# Altium PCB 6C-2L-1550um.PcbDoc
Units mm, origin at the board's own origin, x right, y up, seen from the top; angles counter-clockwise.
Board outline 17.5 x 20 mm, 2 copper layers (Top Layer, Bottom Layer), stack 1.586 mm thick; 22 components, 13 nets, 82 pads, 21 vias.
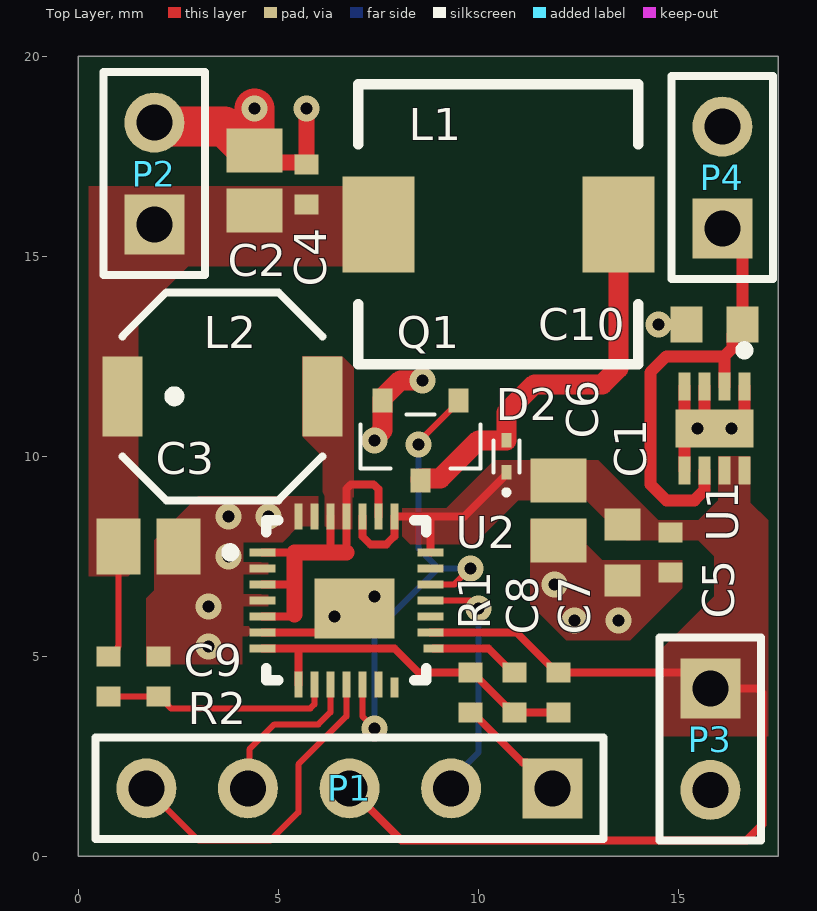
[diagram p0: Top Layer view]
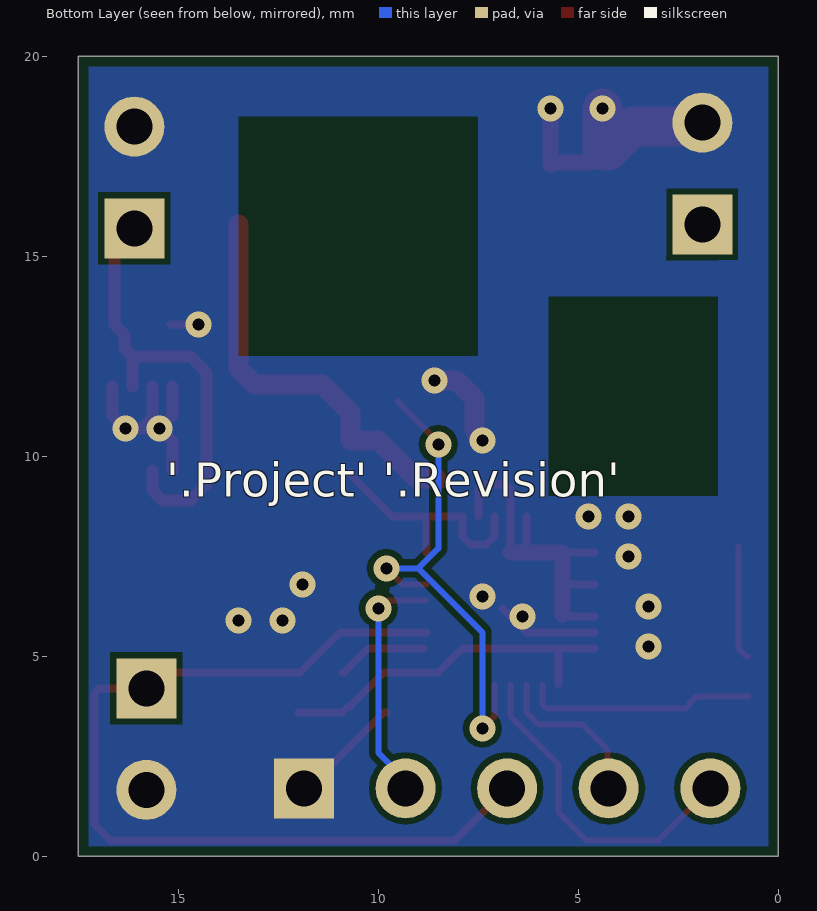
[diagram p1: Bottom Layer view, seen from below]
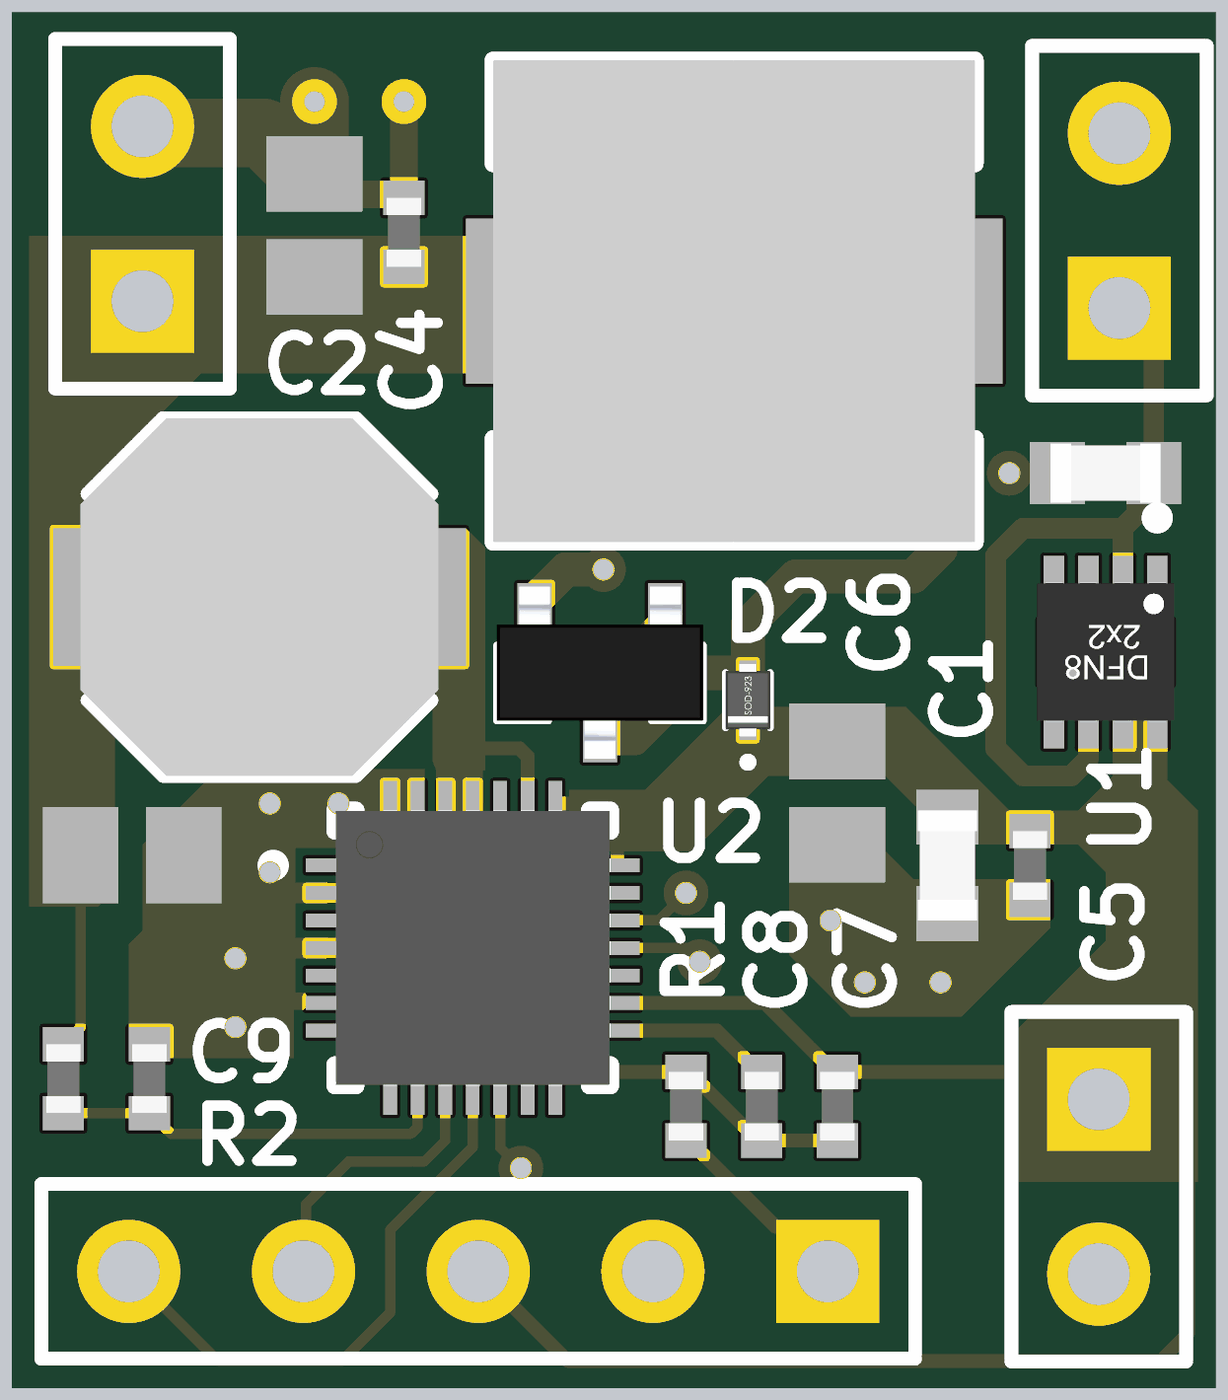
[diagram p2: 3D render of the assembled board from above, using the file's embedded part models]

## Layer stack, top to bottom
Top Solder: solder mask 0.0102, Solder Resist, Dk 3.5
Top Layer: signal copper 0.018
Dielectric1: core 1.55, FR-4, Dk 4.8
Bottom Layer: signal copper 0.018
Bottom Solder: solder mask 0.0102, Solder Resist, Dk 3.5

## Board outline
0,0 17.5,0 17.5,20 0,20

## Design rules (kind name [scope] priority, off if disabled: settings)
BoardOutlineClearance [All] p1: gap=0.25 ignorepadtopadclearanceinfootprint=FALSE except(0: Arc-SplitContinuation Track-SplitContinuation SMDPad-SplitContinuation THPad-SplitContinuation Via-SplitContinuation Fill-SplitContinuation Poly-SplitContinuation Region-SplitContinuation Text-SplitContinuation)
Clearance Clearance-xPP-xTP-xTT [All] p1: gap=0.15 ignorepadtopadclearanceinfootprint=FALSE except(0: Arc-Hole Track-Hole SMDPad-Hole THPad-Hole Via-Hole Fill-Hole Poly-Hole Region-Hole Text-Hole)
ComponentClearance [All] p1: gap=0.25 collisioncheckmode=3 verticalgap=0.25 showdistances=FALSE
DiffPairsRouting [All] p1: maxlimit=0.25 minlimit=0.25 mostfreqgap=0.25 toplayer_minwidth=0.381 toplayer_maxwidth=0.381 toplayer_prefwidth=0.381 bottomlayer_minwidth=0.381 bottomlayer_maxwidth=0.381 bottomlayer_prefwidth=0.381 maxuncoupledlength=12.5
Height [All] p1: minheight=0 maxheight=25 prefheight=12.5
HoleSize HoleSize-PTH [All] p1: absolutevalues=TRUE maxlimit=2 minlimit=0.25 maxpercent=80.000 minpercent=20.000
HoleToHoleClearance [All] p1: gap=0.35 allowstackedmicrovias=TRUE
MinimumAnnularRing "Minimum IAR  >0.45mm" [((ObjectKind = 'Pad') OR (ObjectKind = 'Via')) And (Layer = 'MultiLayer') And (HoleDiameter > AsMM(0.45))] p1: minimumring=0.175 // minimum inner annular ring for pads > 0.45mm finished hole size
MinimumAnnularRing "Minimum IAR <=0.45mm" [((ObjectKind = 'Pad') OR (ObjectKind = 'Via')) And (Layer = 'MultiLayer') And (HoleDiameter <= AsMM(0.45))] p2: minimumring=0.175 // minimum inner annular ring for pads <= 0.45mm finished hole size
MinimumSolderMaskSliver [All] p1: minsoldermaskwidth=0.08
PlaneClearance PlaneClearance-IPI [All] p1: clearance=0.25
PlaneConnect [All] p1: planeconnectstyle=Relief reliefexpansion=0.175 reliefentries=4 reliefconductorwidth=0.2 reliefairgap=0.2
PolygonConnect PolygonConnect-xTW [All] p1: connectstyle=Direct reliefconductorwidth=0.2 reliefentries=4 polygonreliefangle="90 Angle" airgapwidth=0.2
RoutingCorners [All] p1: cornerstyle=45-Degree minsetback=2.5 maxsetback=2.5
RoutingVias "RoutingVias <= 0.45mm" [(ObjectKind = 'Via') And (HoleDiameter <= AsMM(0.45))] p1: holewidth=0.3 width=0.65 viastyle="Through Hole" minholewidth=0.25 minwidth=0.6 maxholewidth=0.45 maxwidth=0.8 // finishet hole size <= 0.45mm
RoutingVias "RoutingVias > 0.45mm" [(ObjectKind = 'Via') And (HoleDiameter > AsMM(0.45))] p2: holewidth=0.5 width=0.85 viastyle="Through Hole" minholewidth=0.5 minwidth=0.85 maxholewidth=0.9 maxwidth=1.25 // finishet hole size > 0.45mm
SilkToSilkClearance [All] p1: silktosilkclearance=0.2
SilkToSolderMaskClearance SilkscreenOverComponentPads [IsPad] p1: minsilkscreentomaskgap=0.2 clearancetoexposedcopper=TRUE
SolderMaskExpansion [All] p1: expansion=0 istentingtop=FALSE
UnRoutedNet [All] p1: checkbadconnections=TRUE
Width Width-xTW [All] p1: maxlimit=1.5 minlimit=0.15 preferedwidth=0.2
18 further rules are at their usual default settings.

## Classes and differential pairs
component class Sunboost: C1 C2 C3 C4 C5 C6 C7 C8 C9 C10 D2 L1 L2 P1 P2 P3 P4 R1 R2 U1

## Components (designator, comment, footprint, x,y, rotation, side; value= is the part's Value field where it differs from the comment)
C1 "Cap_0603" 0603 13.6,7.6 r90 top value=2.2uF
C2 "Cap_0805" 0805 4.4,16.9 r270 top value=22uF
C3 "Cap_0805" 0805 1.75,7.75 r180 top value=22uF
C4 "Cap_0402" 0402 5.7,16.8 r270 top value=100nF
C5 "Cap_0402" 0402 14.8,7.6 r90 top value=100nF
C6 "Cap_0805" 0805 12,8.65 r90 top value=22uF
C7 "Cap_0402" 0402 12,4.1 r90 top value=100nF
C8 "Cap_0402" 0402 10.9,4.1 r90 top value=470nF
C9 "Cap_0402" 0402 2,4.5 r270 top value=100nF
C10 "Cap_0603" 0603 15.9,13.3 r0 top value=2.2uF
D2 "NSR0140P2" SOD-923 10.7,9.6 r90 top
L1 "SRR7045-102M" SRR7045-102M 7.5,15.8 r0 top value=X
L2 "SD53-4R7-R" SD53-4R7-R 3.6,11.5 r0 top value=X
P1 "Header 5" HDR1X5 11.86,1.7 r180 top
P2 "Header 2" HDR1X2 1.9,15.8 r90 top
P3 "Header 2" HDR1X2 15.8,4.2 r270 top
P4 "Header 2" HDR1X2 16.1,15.7 r90 top
Q1 "PMV130ENE" SOT-23 9.5,11.4 r180 top
R1 "Res_0402" 0402 9.8,4.1 r270 top value=0
R2 "Res_0402" 0402 0.75,4.5 r270 top value=51K
U1 "MCP1810" VDFN8 16.65,11.75 r270 top
U2 "Sunboost 3" 28-QFN_0.4mm 4.6,7.6 r0 top

## Footprints (in the part's own frame and the unit in brackets; to place one, negate y for a bottom-side part, rotate by r counter-clockwise, add the part's x,y. Pads: shape width x height; smd on the part's side, far side on the other; paste and mask are expansions set on the pad)
28-QFN_0.4mm [mm]
  rect 0.65x0.2 smd mask+0.05: 1(0,0) 2(0,-0.4) 3(0,-0.8) 4(0,-1.2) 5(0,-1.6) 6(0,-2) 7(0,-2.4) 16(4.2,-2) 17(4.2,-1.6) 18(4.2,-1.2) 19(4.2,-0.8) 20(4.2,-0.4) 21(4.2,0)
  rect 0.2x0.65 smd mask+0.05: 8(0.9,-3.3) 9(1.3,-3.3) 10(1.7,-3.3) 11(2.1,-3.3) 12(2.5,-3.3) 13(2.9,-3.3) 22(3.3,0.9) 23(2.9,0.9) 24(2.5,0.9) 25(2.1,0.9) 26(1.7,0.9) 27(1.3,0.9) 28(0.9,0.9)
  rect 0.2x0.5 smd mask+0.05: 14(3.3,-3.375)
  rect 0.5x0.2 smd mask+0.05: 15(4.275,-2.4)
  rect 2x1.5 smd mask+0.05: 29(2.3,-1.4)
  silkscreen extent -0.9,-3.2 4.1,0.8, body extent 0.1,-3.2 4.1,0.8, height 0.75
0402 [mm]
  rect 0.5x0.6 smd mask+0.05: 1(-0.5,0) 2(0.5,0)
  body extent -0.5,-0.25 0.5,0.25, height 0.25
0603 [mm] "0603 footprint"
  rect 0.8x0.9 smd: 1(-0.7,0) 2(0.7,0)
  body extent -0.8,-0.43 0.8,0.43, height 0.48
0805 [mm] "Chip Capacitor, Body 2.0x1.3mm, IPC High Density"
  rect 1.1x1.4 smd: 1(-0.75,0) 2(0.75,0)
  body extent -1.1,-0.72 1.1,0.72, height 1.4
HDR1X2 [mm] "Connector; Header; 2 Position"
  rect 1.5x1.5 hole 0.9: 1(0,0)
  round 1.5 hole 0.9: 2(2.54,0)
  silkscreen extent -1.27,-1.27 3.81,1.27
HDR1X5 [mm] "Connector; Header; 5 Position"
  rect 1.5x1.5 hole 0.9: 1(0,0)
  round 1.5 hole 0.9: 2(2.54,0) 3(5.08,0) 4(7.62,0) 5(10.16,0)
  silkscreen extent -1.27,-1.27 11.43,1.27
SD53-4R7-R [mm]
  rect 1x2 smd mask+0.05: 1(-2.5,0) 2(2.5,0)
  silkscreen extent -2.5,-2.6 2.5,2.6, body extent -2.6,-2.6 2.6,2.6, height 3
SOD-923 [mm]
  rect 0.36x0.25 smd mask+0.05: 1(0,0) 2(0.8,0)
  silkscreen extent -0.52,-0.33 0.8,0.33, body extent -0.12,-0.32 0.93,0.32, height 0.43
SOT-23 [mm]
  rect 0.5x0.6 smd mask+0.05: 1(0,0) 2(1.9,0) 3(0.95,2)
  silkscreen extent -0.55,0.35 2.45,1.7, body extent -0.55,-0.25 2.45,2.25, height 1.1
SRR7045-102M [mm]
  rect 1.8x2.4 smd mask+0.05: 1(0,0) 2(6,0)
  silkscreen extent -0.5,-3.5 6.5,3.5, body extent -0.5,-3.5 6.5,3.5, height 4.5
VDFN8 [mm] "2x2mm"
  rect 0.7x0.3 smd mask+0.05: 1(0,0) 2(0,-0.5) 3(0,-1) 4(0,-1.5) 5(2.1,-1.5) 6(2.1,-1) 7(2.1,-0.5) 8(2.1,0)
  rect 0.95x1.95 smd mask+0.05: 9(1.05,-0.75)
  silkscreen extent -1,-0.1 -0.8,0.1, body extent 0.04,-1.75 2.06,0.25, height 0.95

## Part data
C1 C2 C3 C4 C5 C6 C7 C8 C9 C10: "Capacitor", LatestRevisionDate=17-Jul-2002, LatestRevisionNote="Re-released for DXP Platform.", PackageDescription="Radial Cap, Thru-Hole; 2 Leads; 0.3 in Pin Spacing", PackageReference=RAD-0.3, Published=8-Jun-2000, Publisher="Altium Limited"
D2: "Typical INFRARED GaAs LED", LatestRevisionDate=08-Jul-2005, LatestRevisionNote="Mech Layer 1 removed.", PackageDescription="LED; 2 Leads", PackageReference=LED-0, Published=8-Jun-2000, Publisher="Altium Limited"
L1 L2: "Inductor"
P1: "Header, 5-Pin", LatestRevisionDate=17-Jul-2002, LatestRevisionNote="Re-released for DXP Platform.", Publisher="Altium Limited"
P2 P3 P4: "Header, 2-Pin", LatestRevisionDate=17-Jul-2002, LatestRevisionNote="Re-released for DXP Platform.", Publisher="Altium Limited"
Q1: "N-Channel MOSFET", LatestRevisionDate=17-Jul-2002, LatestRevisionNote="Re-released for DXP Platform.", PackageDescription="TO, Flat Index; 3 In-Line, Axial Leads; Body Dia. 4.6mm; Lead Dia. 0.5 mm (max)", PackageReference=E3, PackageVersion=1995/1996, Published=8-Jun-2000, Publisher="Altium Limited"
R1 R2: "Resistor", LatestRevisionDate=17-Jul-2002, LatestRevisionNote="Re-released for DXP Platform.", PackageDescription="Axial Device, Thru-Hole; 2 Leads; 0.4 in Pin Spacing", PackageReference=AXIAL-0.4, Published=8-Jun-2000, Publisher="Altium Limited"
U1: "3V Regulator, 150 mA"
U2: "Initvation Sunboost 3"

## Via types
v1: diameter 0.65, hole 0.3, Top Layer to Bottom Layer, tented both sides, 19 vias
v2: diameter 0.65, hole 0.3, Top Layer to Bottom Layer, 2 vias

## Nets (pads, with @x,y where several pads share a name; then routed paths per layer and width w, separated by ;. In a path a pad name is that pad's centre, name@x,y a point inside that pad or via, vN(x,y) a via of type N, cw(c..) or ccw(c..) an arc to the next point about the centre after c; other vN are vias at no path point)
DGND: C7.1 C8.1 R1.1 U2.7 U2.8 | length 9
  Top Layer w0.2: U2.7 5.5,5.2 ; U2.8 5.5,5.2 ; C7.1 C8.1 10.75,3.75 10.7,3.75 9.85,4.6 R1.1 8.5,4.6 7.9,5.2 5.5,5.2
GND: C1.1 C2.1 C3.1 C4.1 C5.1 C6.1 C9.1 C10.1 P1.1 P2.2 P3.2 P4.2 Q1.2 R1.2 U1.1 U1.3 U1.4 U1.5 U1.9 U2.2 U2.4 U2.6 U2.27 U2.28 U2.29 | length 20.7
  Top Layer w0.2: U2.6 6.3,5.6 U2.29 ; R1.2 9.85,3.6 11.1,2.35 11.21,2.35 P1.1 ; v1(14.5,13.3) C10.1
  Top Layer w0.3: U1.5 15.15,10.375 v1(15.475,10.7) ; U1.4 15.15,11.025 v1(15.475,10.7) ; U1.3 15.65,10.95 U1.9 ; U1.1 16.65,11.025 v1(16.325,10.7) U1.9 ; v1(15.475,10.7) U1.9
  Top Layer w0.4: C2.1 4.7,17.35 5.65,17.35 C4.1 v2(5.7,18.7)
  Top Layer w0.5: v1(7.4,10.4) 7.4,10.441 7.6,10.641 7.6,11.45 8.05,11.9 v1(8.6,11.9)
  Top Layer w1: P2.2 1.996,18.244 3.656,18.244 4.25,17.65 C2.1 v2(4.4,18.7)
  other v1: 3.25,5.25 12.4,5.9 13.5,5.9 6.4,6 3.25,6.25 7.4,6.5 11.9,6.8 3.75,7.5 3.75,8.5 4.75,8.5
ICSP: P1.2 U2.18 | length 6.1
  Top Layer w0.15: U2.18 9.8,6.4 v1(10,6.2)
  Bottom Layer w0.15: P1.2 9.32,1.91 10,2.59 v1(10,6.2)
ICSPCLK: P1.4 U2.10 | length 4.1
  Top Layer w0.15: P1.4 4.275,1.735 4.275,2.675 4.9,3.3 6,3.3 6.3,3.6 U2.10
ICSPDAT: P1.5 U2.11 | length 8.3
  Top Layer w0.15: P1.5 3,0.4 4.8,0.4 5.5,1.1 5.5,2.3 6.7,3.5 U2.11
NetC8_2: C8.2 U2.15 | length 2.3
  Top Layer w0.2: U2.15 10.25,5.2 10.85,4.6 C8.2
NetC9_2: C9.2 R2.2 U2.9 | length 5.8
  Top Layer w0.15: R2.2 2.05,4 2.225,3.825 2.225,3.788 2.313,3.7 5.8,3.7 5.9,3.8 U2.9
NetD2_2: D2.2 L1.2 Q1.3 | length 10.1
  Top Layer w0.5: Q1.3 8.55,9.45 9.05,9.45 10,10.4 D2.2 10.7,11.1 11.4,11.8 13.1,11.8 13.5,12.2 L1.2
NetL2_2: L2.2 U2.1 U2.3 U2.5 U2.23 U2.25 U2.26 | length 9.3
  Top Layer w0.2: U2.5 5.35,6 5.4,6.05 ; U2.3 5.4,6.8 ; U2.1 5.4,7.6 ; 6.3,7.6 U2.26 ; 6.7,7.6 6.7,8.216 U2.25 6.7,9.183 6.817,9.3 7.383,9.3 7.5,9.183 U2.23
  Top Layer w0.4: 5.4,6.05 5.4,6.8 5.4,7.6 6.3,7.6 6.7,7.6
PWM: Q1.1 U2.12 U2.19 | length 12.7
  Top Layer w0.15: U2.12 7.1,3.5 v1(7.4,3.2) ; v1(8.5,10.3) 8.5,10.35 9.5,11.35 Q1.1 ; U2.19 9.4,6.8 v1(9.8,7.2)
  Bottom Layer w0.15: v1(7.4,3.2) 7.4,5.6 9,7.2 ; v1(8.5,10.3) 8.5,7.7 9,7.2 ; v1(9.8,7.2) 9,7.2
Solar+: C2.2 C3.2 C4.2 L1.1 L2.1 P2.1 R2.1 | length 2.9
  Top Layer w0.15: R2.1 0.8,5 0.975,5.175 0.975,5.225 1,5.25 C3.2
VCC: C1.2 C5.2 C6.2 C7.2 D2.1 P1.3 P3.1 U1.7 U1.8 U2.16 U2.21 U2.22 U2.24 | length 29.4
  Top Layer w0.2: P1.3 8.08,0.4 16.7,0.4 17.1,0.8 17.1,4.083 16.983,4.2 P3.1 15.4,4.6 C7.2 11.95,4.6 10.95,5.6 U2.16 ; U2.24 7.1,8 7.3,7.8 7.7,7.8 7.9,8 U2.22 8.778,8.5 ; U2.21 8.8,8.477 8.778,8.5 ; D2.1 10.7,9.545 9.655,8.5 8.778,8.5
VDD: C10.2 P4.1 U1.2 U1.6 | length 11.3
  Top Layer w0.3: U1.6 15.65,9.15 15.4,8.9 14.7,8.9 14.3,9.3 14.3,12.1 14.7,12.5 16.15,12.5 ; P4.1 16.6,15.2 C10.2 16.35,13.05 16.35,12.7 16.15,12.5 ; U1.2 16.15,12.5
pads on no net: U2.13 U2.14 U2.17 U2.20

## Polygon pours and split planes (outlines as drawn)
VCC on Top Layer "VCC_L01_P004" (solid, pour order 4): 8.1,8 8.1,8.7 9.2,8.7 10.4,9.9 13,9.9 14.5,8.4 17.9,8.4 17.9,3 14.5,3 14.5,5.1 15.9,6.5 15.9,7.5 15.5,7.9 13.7,7.9 12.7,8.9 11,8.9 9.9,7.8 8.3,7.8
GND on Top Layer "GND_L01_P001" (solid, pour order 1): 1.9,7.9 1.9,6.65 1.75,6.5 1.75,6 2.5,6 3,5.5 4.75,5.5 4.75,7.5 5.5,8.25 6,8.25 6,9 3,9
NetL2_2 on Top Layer "NETL2_2_L01_P012" (solid, pour order 12): 6.6,12.5 6.882,12.218 6.882,8.176 6.115,8.176 6.115,9.985 5.6,10.5 5.6,12.5
GND on Top Layer "GND_L01_P011" (solid, pour order 11): 11.3,8.4 11.3,6.3 12.2,5.4 13.8,5.4 15.1,6.7 15.1,7.4 13.1,7.4 12.7,7.8 12.7,8.4
VCC on Top Layer "VCC_L01_P005" (solid, pour order 5): 16,10 16.8,10 16.8,8.845 17.3,8.345 17.3,7.1 16.4,7.1 15.3,8.2 16,8.9
GND on Top Layer "GND_L01_P002" (solid, pour order 2): 1.75,6.5 1.7,6.45 1.7,4.8 4.1,4.8 4.1,5.8 3.4,6.5
Solar+ on Top Layer "SOLAR+_L01_P000" (solid, pour order 0): -0.5,16.75 8.25,16.75 8.25,14.75 2.75,14.75 1.5,13.5 1.5,7.25 1.25,7 -0.5,7
GND on Bottom Layer "GND_L02_P008" (solid, pour order 8): 0,20 17.5,20 17.5,0 0,0 0,9 5.75,9 5.75,12.5 13.5,12.5 13.5,18.5 7,18.5 7,14 0,14
GND on Bottom Layer "GND_L02_P010" (solid, pour order 10): 0,20 7.5,20 7.5,11.5 5.75,11.5 5.75,15 0,15
GND on Bottom Layer "GND_L02_P009" (solid, pour order 9): 0,20 1.5,20 1.5,7 0,7

## Silkscreen, mask and mechanical layers (free items; w line width, h text height)
Bottom Overlay:
  text "'.Project' '.Revision'" at 15.3,8.983 h0.85
Dimensions:
  the board outline again, w0.1